# EAGLE board main_board2 (copy) (EAGLE 5.11)
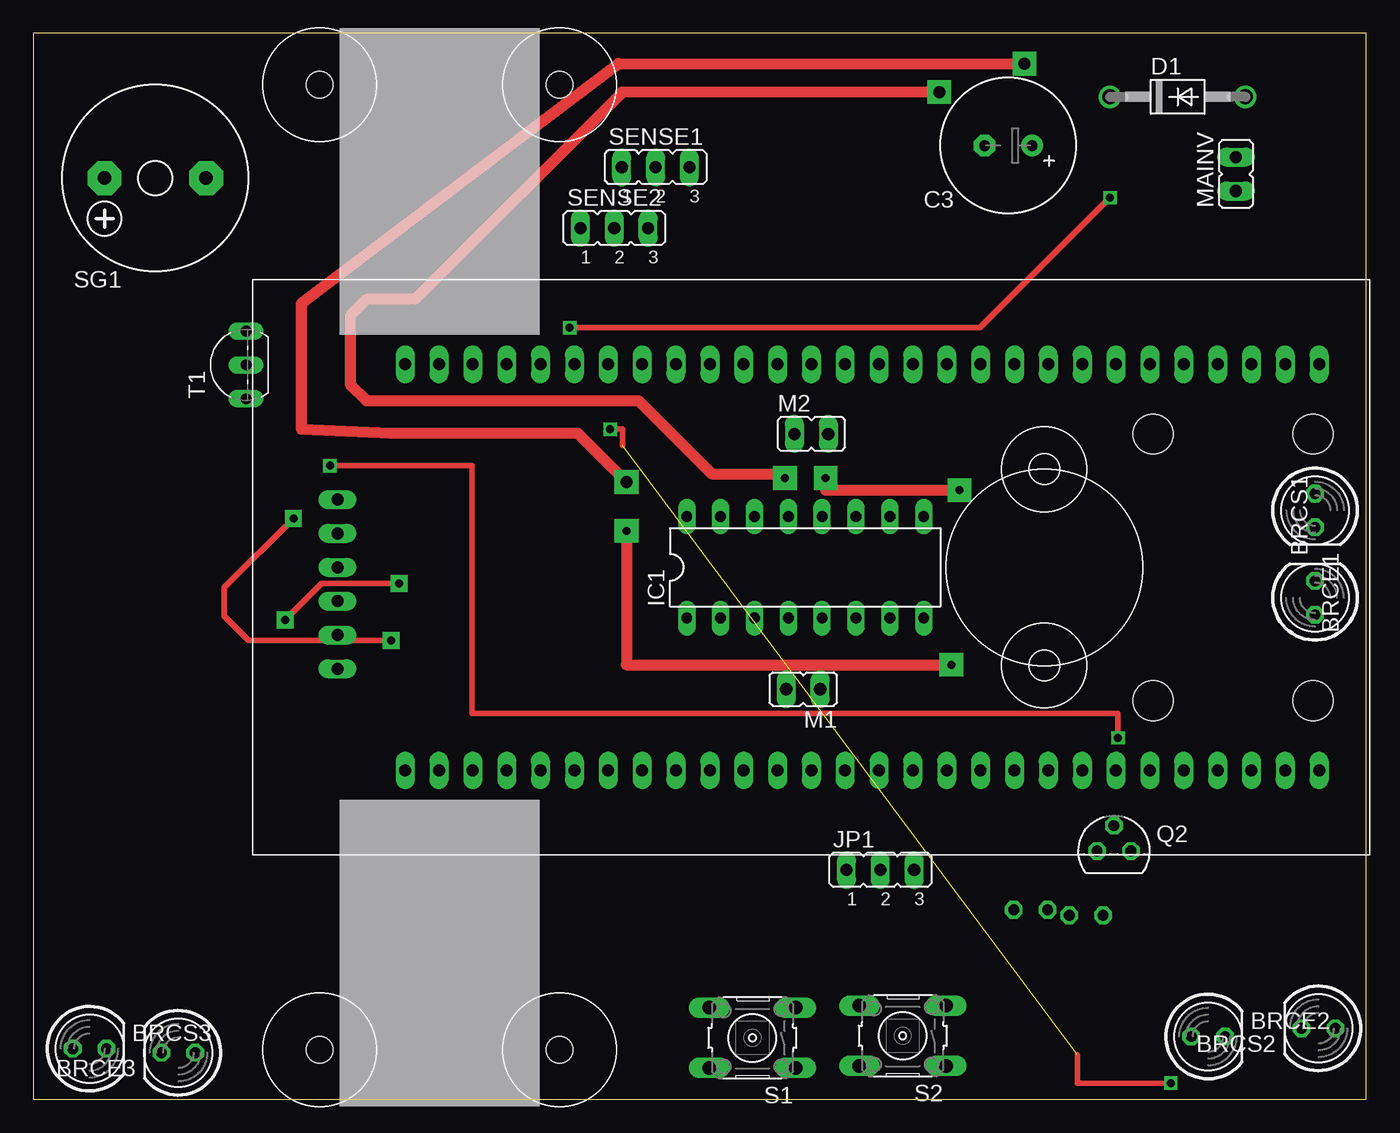
[diagram p0: board, top side]
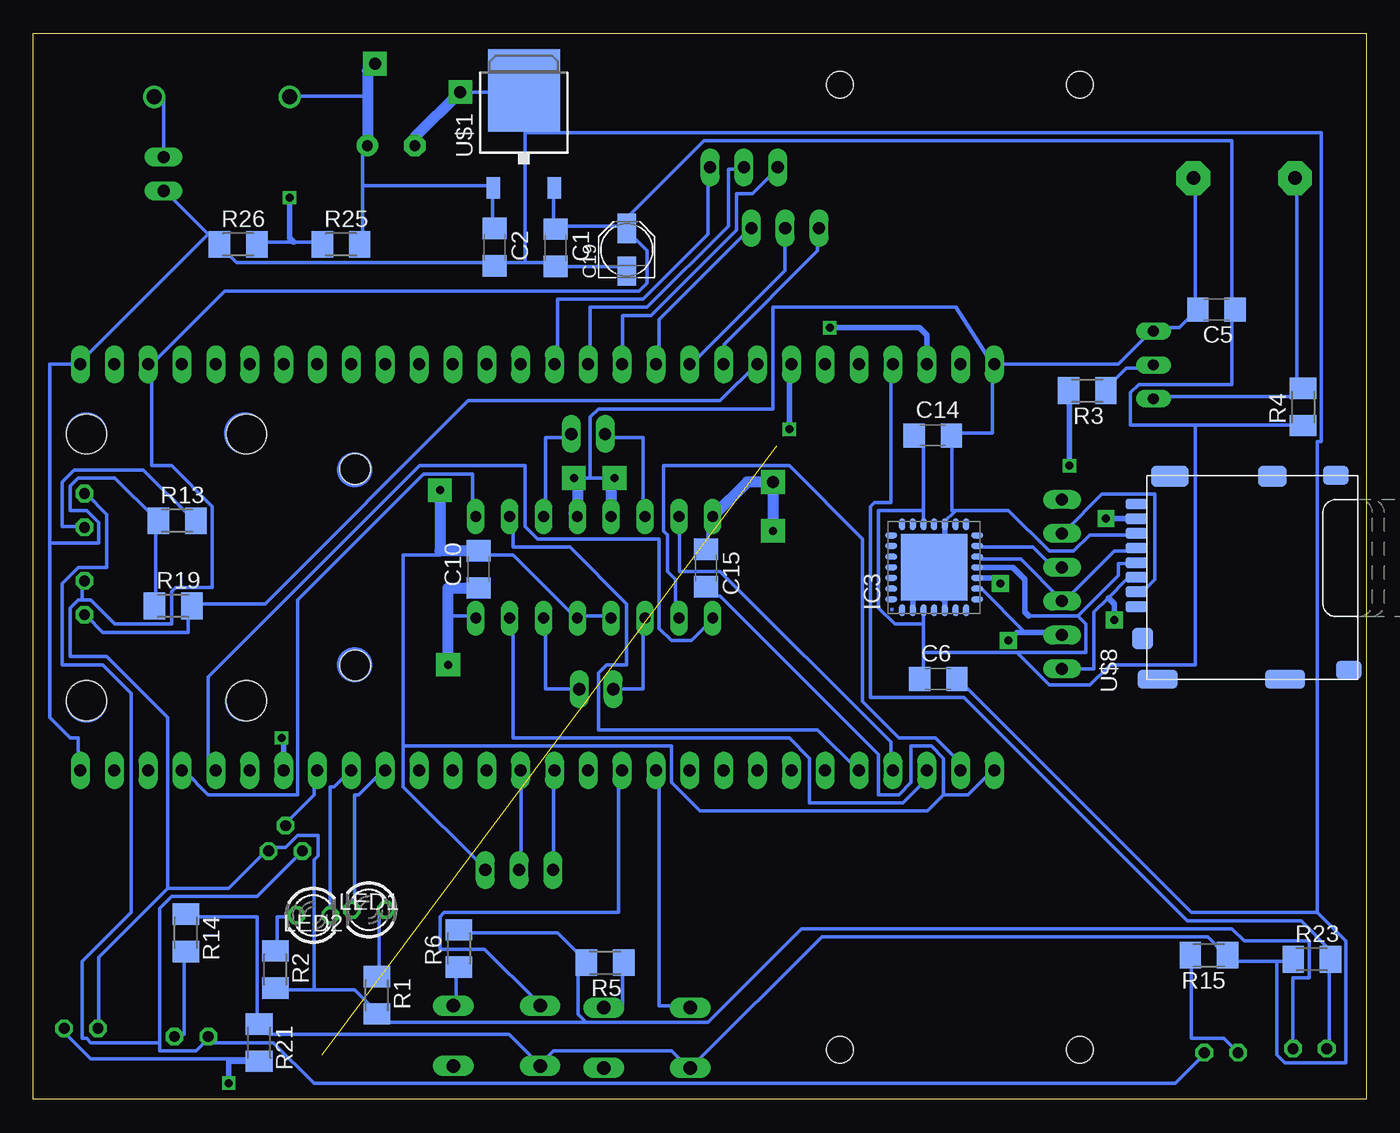
[diagram p1: board, bottom side, seen from below]

Size 100 x 80 mm. Coordinates in mm from the lower left corner, seen from the top.
Outline: 0,0 100,0 100,80 0,80 0,0
Copper layers (1*16): Top 0.035mm / dielectric 1.5mm / Bottom 0.035mm
Design rules "default": minimum track width 10mil, minimum drill 24mil, track to track 8mil, track to pad 8mil, pad to pad 8mil, via to via 8mil, smd to smd 8mil, copper to edge 40mil, drill to drill 8mil, minimum pad ring 10mil, minimum via ring 8mil, stop-mask expansion 4mil, vias tented up to drill 0mil, thermal gap 10mil
Holes 3 mm at 96.01,49.93 96.01,29.93 84.01,49.93 84.01,29.92

## Footprints (pad centres in the part's own frame; a part is rotated, then mirrored left to right if it is on the bottom)
LED5MM = drill 0.813 octagon: A -1.27,0; K 1.27,0
C1206 = smd 1.6 x 1.8: 1 -1.4,0; 2 1.4,0
E3,5-10 = drill 0.813 pad 1.6 round: + -1.778,0 | drill 0.813 pad 1.6 octagon: - 1.778,0
PANASONIC_B = smd 2.2 x 1.4: + 1.6,0; - -1.6,0
DO41-10 = drill 1.118 round: A 5.08,0; C -5.08,0
DIL16 = drill 0.813 long: 1 -8.89,-3.81; 2 -6.35,-3.81; 3 -3.81,-3.81; 4 -1.27,-3.81; 5 1.27,-3.81; 6 3.81,-3.81; 7 6.35,-3.81; 8 8.89,-3.81; 9 8.89,3.81; 10 6.35,3.81; 11 3.81,3.81; 12 1.27,3.81; 13 -1.27,3.81; 14 -3.81,3.81; 15 -6.35,3.81; 16 -8.89,3.81
QFPN-28 = smd 0.9 x 0.45: 1 -3.225,2.4; 2 -3.225,1.6; 3 -3.225,0.8; 4 -3.225,0; 5 -3.225,-0.8; 6 -3.225,-1.6; 7 -3.225,-2.4; 15 3.225,-2.4; 16 3.225,-1.6; 17 3.225,-0.8; 18 3.225,0; 19 3.225,0.8; 20 3.225,1.6; 21 3.225,2.4 | smd 0.45 x 0.9: 8 -2.4,-3.225; 9 -1.6,-3.225; 10 -0.8,-3.225; 11 0,-3.225; 12 0.8,-3.225; 13 1.6,-3.225; 14 2.4,-3.225; 22 2.4,3.225; 23 1.6,3.225; 24 0.8,3.225; 25 0,3.225; 26 -0.8,3.225; 27 -1.6,3.225; 28 -2.4,3.225 | smd 5 x 5: TH 0,0
JP2 = drill 0.914 long: 1 -2.54,0; 2 0,0; 3 2.54,0
LED3MM = drill 0.813 octagon: A -1.27,0; K 1.27,0
JP1 = drill 0.914 long: 1 0,-1.27; 2 0,1.27
TO92 = drill 0.813 octagon: 1 1.27,0; 2 0,1.905; 3 -1.27,0
M1206 = smd 1.6 x 2: 1 -1.4,0; 2 1.4,0
B3F-10XX = drill 1.016 long: 1 -3.251,2.261; 2 3.251,2.261; 3 -3.251,-2.261; 4 3.251,-2.261
F/CM12P = drill 1.016 pad 2.54 octagon: + 3.81,0; - -3.81,0
TO92-CBE = drill 0.813 long: B 0,0; C -2.54,0; E 2.54,0
DPAK = smd 1 x 1.6: 1 -2.28,-6.07; 3 2.28,-6.07 | smd 5.4 x 6.2: 2 0,1.23
STM32_DISCOVERY = drill 0.9 long: 3V3 -15.24,29.21; 5V 15.24,29.21; BOOT 15.24,21.59; GND@1 -15.24,34.29; GND@2 15.24,34.29; GND@3 -15.24,-34.29; GND@4 15.24,-34.29; NC@1 -15.24,31.75; NC@2 15.24,31.75; PA0 -15.24,-1.27; PA1 -15.24,-3.81; PA2 -15.24,-6.35; PA3 -15.24,-8.89; PA4 -15.24,-11.43; PA5 -15.24,-13.97; PA6 -15.24,-16.51; PA7 -15.24,-19.05; PA8 15.24,-21.59; PA9 15.24,-19.05; PA10 15.24,-16.51; PA11 15.24,-13.97; PA12 15.24,-11.43; PA13 15.24,-8.89; PA14 15.24,-6.35; PA15 15.24,-3.81; PB0 -15.24,-26.67; PB1 -15.24,-29.21; PB2 -15.24,-31.75; PB3 15.24,8.89; PB4 15.24,11.43; PB5 15.24,13.97; PB6 15.24,16.51; PB7 15.24,19.05; PB8 15.24,24.13; PB9 15.24,26.67; PB10 -5.08,-39.37; PB11 -2.54,-39.37; PB12 0,-39.37; PB13 2.54,-39.37; PB14 5.08,-39.37; PB15 7.62,-39.37; PC0 -15.24,8.89; PC1 -15.24,6.35; PC2 -15.24,3.81; PC3 -15.24,1.27; PC4 -15.24,-21.59; PC5 -15.24,-24.13; PC6 15.24,-31.75; PC7 15.24,-29.21; PC8 15.24,-26.67; PC9 15.24,-24.13; PC10 15.24,-1.27; PC11 15.24,1.27; PC12 15.24,3.81; PC13 -15.24,24.13; PC14 -15.24,21.59; PC15 -15.24,19.05; PD0 -15.24,16.51; PD1 -15.24,13.97; PD2 15.24,6.35; RST -15.24,11.43; VBAT -15.24,26.67
MICRO_SD_CONNECTOR = smd 0.8 x 1.6: 1 -2.03,8.2; 2 -0.93,8.2; 3 0.17,8.2; 4 1.27,8.2; 5 2.37,8.2; 6 3.47,8.2; 7 4.57,8.2; 8 5.67,8.2 | smd 1.55 x 2.8: 9 7.735,5.7 | smd 1.55 x 2.1: 10 7.735,-2 | smd 1.4 x 1.9: 11 7.81,-6.75; 12 -6.79,-7.75 | smd 1.4 x 3: 13 -7.49,-2.95; 14 -7.49,6.6 | smd 1.6 x 1.55: 15 -4.43,7.725
BALLB = hole 2.286: -7.366,0; 7.366,0
MOTORB = hole 2: -9,7.25; 9,7.25

## Placement (x,y rotation side)
BRCE1  [LED5MM]  96.16,44.2 270 top
BRCE2  [LED5MM]  88.14,4.72 0 top
BRCE3  [LED5MM]  10.87,3.51 180 top
BRCS1  [LED5MM]  96.16,37.64 90 top
BRCS2  [LED5MM]  96.42,5.33 180 top
BRCS3  [LED5MM]  4.22,3.81 0 top
C1  100n  [C1206]  60.81,63.91 270 bottom
C2  100n  [C1206]  65.38,63.96 270 bottom
C3  2000uF  [E3,5-10]  73.15,71.58 180 top
C5  100n  [C1206]  11.23,59.28 180 bottom
C6  100n  [C1206]  32.11,31.55 0 bottom
C10  100n  [C1206]  66.6,39.78 90 bottom
C14  100n  [C1206]  32.51,49.83 0 bottom
C15  100n  [C1206]  49.53,39.88 270 bottom
C19  1u  [PANASONIC_B]  55.47,63.75 90 bottom
D1  1N4004  [DO41-10]  85.85,75.23 0 top
IC1  L293D  [DIL16]  57.91,39.93 0 top
IC3  LIS3LV02DQ  [QFPN-28]  32.41,39.93 90 bottom
JP1  [JP2]  63.55,17.22 0 top
LED1  [LED3MM]  78.99,13.82 0 bottom
LED2  [LED3MM]  74.83,14.22 180 bottom
M1  [JP1]  57.76,30.78 90 top
M2  [JP1]  58.37,49.94 270 top
MAINV  [JP1]  90.22,69.44 0 top
Q2  BC557  [TO92]  81.08,18.64 0 top
R1  1k  [M1206]  74.22,7.82 270 bottom
R2  1k  [M1206]  81.84,9.75 270 bottom
R3  1k  [M1206]  20.93,53.19 180 bottom
R4  Rbuzz  [M1206]  4.72,51.97 90 bottom
R5  10k  [M1206]  57.1,10.26 180 bottom
R6  10k  [M1206]  68.07,11.33 90 bottom
R13  200  [M1206]  89.2,43.43 0 bottom
R14  200  [M1206]  88.54,12.5 270 bottom
R15  200  [M1206]  11.79,10.82 180 bottom
R19  10k  [M1206]  89.51,37.03 0 bottom
R21  10k  [M1206]  83.06,4.27 270 bottom
R23  10k  [M1206]  4.06,10.52 0 bottom
R25  100k  [M1206]  76.91,64.16 0 bottom
R26  50k  [M1206]  84.63,64.16 0 bottom
S1  [B3F-10XX]  53.95,4.62 180 top
S2  [B3F-10XX]  65.23,4.78 180 top
SENSE1  [JP2]  46.69,69.95 0 top
SENSE2  [JP2]  43.59,65.38 0 top
SG1  F/CM12P  [F/CM12P]  9.14,69.14 180 top
T1  [TO92-CBE]  15.95,55.12 90 top
U$1  LF33CDT  [DPAK]  63.2,74.47 0 bottom
U$2  STM32_DISCOVERY  [STM32_DISCOVERY]  62.18,39.93 270 top
U$8  MICROSD_SPI_MODE  [MICRO_SD_CONNECTOR]  9.04,39.01 90 bottom
U$9  POLOLU952  [BALLB]  75.84,39.93 90 top
U$10  POLOLU0993B  [MOTORB]  30.48,68.88 0 top
U$11  POLOLU0993B  [MOTORB]  30.48,10.97 180 top

## Library data of the parts
BRCE1-BRCE3 BRCS1-BRCS3 LED1 LED2 = led
C1-C3 C5 C6 C10 C14 C15 C19 = rcl
D1 = diode
IC1 = st-microelectronics; MPN: L293D; OC_FARNELL: 9589619; OC_NEWARK: 56P8249
IC3 = st-microelectronics; MF: Arrow Electronics; MPN: LIS3LV02DQ; OC_FARNELL: 1220909; OC_NEWARK: 89K0642
JP1 M1 M2 MAINV SENSE1 SENSE2 = jumper
Q2 = transistor-pnp
R1-R6 R13-R15 R19 R21 R23 R25 R26 = resistor
S1 S2 = switch-omron; MPN: B3F-1000; OC_FARNELL: 176432; OC_NEWARK: 36M3542
SG1 = buzzer; OC_FARNELL: unknown; OC_NEWARK: unknown
T1 = transistor
U$1 U$9-U$11 = robot
U$2 = stm32_discovery
U$8 = con-molex-microsd

## Nets
+3V3: BRCS1.K BRCS2.K BRCS3.K C1.1 C5.1 C6.1 C14.1 C19.+ IC3.3 IC3.11 IC3.19 Q2.1 R1.2 R2.2 R4.1 R5.2 R6.2 U$1.3 U$2.3V3 U$8.4
+7V: C2.1 C3.+ C10.1 C15.1 D1.C IC1.8 IC1.16 R25.2 U$1.1
GND: C1.2 C2.2 C3.- C5.2 C6.2 C10.2 C14.2 C15.2 C19.- IC1.4 IC1.5 IC1.12 IC1.13 IC3.2 IC3.5 IC3.17 JP1.3 MAINV.1 R13.1 R14.1 R15.1 R19.1 R21.1 R23.1 R26.1 S1.2 S2.2 SG1.- T1.E U$1.2 U$2.GND@1 U$2.GND@2 U$2.GND@3 U$2.GND@4 U$8.6
N$1: SENSE1.3 U$2.PA0
N$2: SENSE1.2 U$2.PA1
N$3: SENSE1.1 U$2.PA2
N$4: SENSE2.3 U$2.PA3
N$5: SENSE2.2 U$2.PA4
N$6: SENSE2.1 U$2.PA5
N$7: LED2.A R1.1
N$8: LED1.A R2.1
N$9: R3.1 T1.B
N$10: R4.2 SG1.+ T1.C
N$11: R6.1 S2.3
N$12: R5.1 S1.3
N$28: BRCE1.K R13.2
N$29: BRCE2.K R14.2
N$30: BRCE3.K R15.2
N$31: BRCE1.A BRCE2.A BRCE3.A Q2.3
N$43: D1.A MAINV.2
N$44: BRCS1.A R19.2 U$2.PA6
N$46: BRCS2.A R21.2 U$2.PA7
N$53: IC1.3 M1.2
N$54: IC1.6 M1.1
N$55: IC1.14 M2.1
N$56: IC1.11 M2.2
PA8: U$2.PA8
PA9: U$2.PA9
PA10: U$2.PA10
PA11: U$2.PA11
PA12: U$2.PA12
PA13: S1.4 U$2.PA13
PA14: S2.4 U$2.PA14
PA15: U$2.PA15
PB0: BRCS3.A R23.2 U$2.PB0
PB1: R25.1 R26.2 U$2.PB1
PB2: U$2.PB2
PB3: U$2.PB3
PB4: LED2.K U$2.PB4
PB5: LED1.K U$2.PB5
PB6: Q2.2 U$2.PB6
PB7: R3.2 U$2.PB7
PB8: IC1.1 U$2.PB8
PB9: IC1.9 U$2.PB9
PB10: U$2.PB10
PB11: U$2.PB11 U$8.2
PB12: IC3.13 U$2.PB12
PB13: IC3.12 U$2.PB13 U$8.5
PB14: IC3.9 U$2.PB14 U$8.7
PB15: IC3.10 U$2.PB15 U$8.3
PC0: U$2.PC0
PC1: U$2.PC1
PC2: U$2.PC2
PC3: U$2.PC3
PC4: U$2.PC4
PC5: U$2.PC5
PC6: IC1.2 U$2.PC6
PC7: IC1.7 U$2.PC7
PC8: IC1.15 U$2.PC8
PC9: IC1.10 U$2.PC9
PC10: JP1.1 U$2.PC10
PC11: JP1.2 U$2.PC11
PC12: U$2.PC12
PC13: U$2.PC13
PC14: U$2.PC14
PC15: U$2.PC15

## Tracks (layer width: path | path; a pad name or v marks a point on that pad's centre or on a via)
+3V3
  Bottom 0.254: 78.94,8.23 81.69,8.23 R2.2 | 78.94,8.23 75.89,8.23 74.37,6.71 R1.2 74.07,6.4 73.46,5.79 58.52,5.79 | R6.2 67.97,12.5 60.66,12.5 58.52,10.36 R5.2 58.52,10.06 59.13,10.06 59.13,6.4 58.52,5.79 | 58.52,5.79 49.38,5.79 42.37,12.8 10.06,12.8 9.14,11.89 4.27,11.89 4.27,9.14 5.49,9.14 BRCS3.K | 12.8,50.6 4.88,50.6 R4.1 | 12.8,50.6 17.68,50.6 17.68,53.03 17.07,53.65 10.06,53.65 10.06,59.13 C5.1 10.06,59.44 10.06,71.93 49.68,71.93 56.08,65.53 | 21.64,36.27 25.3,36.27 | 21.64,36.27 18.59,39.32 18.59,40.23 17.37,40.23 U$8.4 | IC3.11 28.96,39.93 | 33.22,33.53 33.22,31.7 C6.1 | 33.22,33.53 33.22,35.66 | 33.22,35.66 33.22,36.58 IC3.3 | 33.22,44.2 33.22,49.68 33.83,49.68 C14.1 | 33.22,44.2 33.22,43.28 IC3.19 | 33.22,35.66 35.36,35.66 36.58,36.88 36.58,44.2 33.22,44.2 | 21.64,36.27 21.03,35.66 21.03,33.53 26.21,33.53 | 26.21,33.53 33.22,33.53 | 12.8,50.6 12.8,32.61 19.2,32.61 20.73,31.09 23.77,31.09 26.21,33.53 | U$1.3 60.96,68.28 60.96,65.53 C1.1 60.66,65.53 56.08,65.53 | 56.08,65.53 55.47,65.53 C19.+ | 89.92,15.85 85.34,15.85 82.6,18.59 Q2.1 82.3,18.9 81.08,18.9 80.16,19.81 78.64,19.81 78.64,18.29 78.94,17.98 78.94,8.23 | 89.92,15.85 95.1,10.67 95.1,5.49 BRCS2.K | 96.32,37.49 96.32,38.71 BRCS1.K | 96.32,37.49 96.62,37.49 97.23,36.88 97.23,33.22 94.49,33.22 89.92,28.65 89.92,15.85 | 91.14,55.17 91.14,47.55 89.61,47.55 86.56,44.5 86.56,38.41 89.31,38.41 89.61,38.1 89.61,35.66 93.88,35.66 95.71,37.49 96.32,37.49 | 91.14,55.17 85.65,60.66 54.56,60.66 53.95,61.27 53.95,63.7 55.47,65.23 C19.+ | 91.14,55.17 U$2.3V3 | C19.+ 56.08,65.53
  Bottom 0.406: 28.96,39.93 26.52,39.93 25.6,39.01 25.6,36.58 25.3,36.27
+7V  (via drill 0.6 pad 1.78, 0.9 pad 1.78)
  Top 0.813: v44.5,46.33 40.84,49.99 26.82,49.99 20.12,50.29 20.12,59.74 43.89,77.72 v74.37,77.72 | v68.89,32.61 44.5,32.61 v44.5,42.67
  Bottom 0.254: C2.1 65.53,65.53 65.53,68.28 U$1.1 65.53,68.58 75.29,68.58 | C15.1 49.38,41.45 49.38,43.59 IC1.16 | 75.29,68.58 75.29,71.32 74.98,71.32 C3.+ | 75.29,68.58 75.29,64.31 R25.2 | IC1.8 67.06,36.27 68.89,36.27 | D1.C 80.77,75.29 74.93,75.29
  Bottom 0.813: IC1.16 46.43,46.33 v44.5,46.33 v44.5,42.67 | v74.37,77.72 74.93,77.17 74.93,75.29 C3.+ | C10.1 68.89,38.38 68.89,36.27 v68.89,32.61
GND  (via drill 0.6 pad 1.78, 0.9 pad 1.78)
  Top 0.813: v67.97,75.59 44.2,75.59 28.65,60.05 24.99,60.05 23.77,58.83 23.77,53.65 24.99,52.43 45.41,52.43 50.9,46.94 56.39,46.94 v56.39,46.63 | v69.49,45.72 59.44,45.72 v59.44,46.63
  Bottom 0.254: R14.1 88.39,13.72 83.21,13.72 83.21,5.79 R21.1 82.91,5.49 82.3,4.88 64.31,4.88 62.18,2.74 S2.2 61.87,2.74 60.96,3.66 52.12,3.66 50.9,2.44 S1.2 50.6,2.44 40.84,12.19 11.89,12.19 10.67,10.97 R15.1 10.36,10.67 10.06,10.36 6.71,10.36 | 3.66,14.02 13.11,14.02 30.48,31.39 C6.2 | 3.66,14.02 1.52,11.89 1.52,2.74 6.1,2.74 6.71,3.35 6.71,10.36 | 6.71,10.36 5.49,10.36 R23.1 | 86.87,64.92 89.92,67.97 90.22,67.97 MAINV.1 | 86.87,64.92 86.26,64.31 R26.1 85.95,64.01 84.73,62.79 65.53,62.79 C2.2 65.23,62.79 63.09,62.79 | R19.1 90.83,37.19 90.83,43.28 R13.1 90.83,43.59 93.88,46.63 96.62,46.63 97.23,46.02 97.23,44.2 96.01,44.2 95.1,43.28 95.1,41.76 98.75,41.76 | 98.75,41.76 98.75,55.17 96.62,55.17 | 98.75,41.76 98.75,28.65 97.23,27.13 96.62,27.13 96.62,24.69 U$2.GND@2 | 86.87,64.92 96.62,55.17 | 96.62,55.17 U$2.GND@1 | SG1.- 12.8,68.89 12.8,59.44 C5.2 12.8,59.13 14.02,57.91 15.85,57.91 T1.E 16.15,57.61 18.59,55.17 U$2.GND@3 28.04,55.17 | 30.79,44.2 26.82,44.2 23.77,41.15 21.95,41.15 20.73,42.37 17.37,42.37 U$8.6 | 30.79,44.2 31.7,43.28 IC3.17 | 30.79,44.2 31.09,44.2 31.09,49.68 C14.2 31.09,49.99 28.04,49.99 28.04,55.17 | 31.7,22.86 31.7,25.6 32.61,26.52 34.14,26.52 34.14,23.77 35.05,22.86 36.58,22.86 36.58,25.91 48.46,37.8 48.77,37.8 49.38,38.41 C15.2 | 31.7,22.86 29.87,22.86 28.04,24.69 U$2.GND@4 | 63.09,62.79 60.96,62.79 C1.2 60.66,62.48 55.78,62.48 55.47,62.18 C19.- | 63.09,72.54 63.09,75.59 U$1.2 63.4,75.59 v67.97,75.59 | 63.09,72.54 63.09,62.79 | IC1.4 56.69,36.27 59.13,36.27 IC1.5 59.44,36.27 64.01,40.84 66.45,40.84 C10.2 | 72.24,26.52 72.24,40.84 69.49,40.84 69.49,41.18
  Bottom 0.254: 72.24,26.52 72.24,23.47 66.14,17.37 JP1.3 | v56.39,46.63 58.22,46.63 | 58.22,46.63 v59.44,46.63 | 31.7,22.86 32.92,21.64 49.99,21.64 52.12,23.77 52.12,26.52 72.24,26.52 | 28.04,55.17 30.79,59.44 44.5,59.44 44.5,51.82 57.61,51.82 58.22,51.21 58.22,46.63 | 3.66,14.02 3.66,49.38 3.35,49.38 3.35,72.54 63.09,72.54
  Bottom 0.406: IC3.2 34.01,37.67 34.14,37.8 33.53,38.41 32.61,38.41 31.61,37.4 IC3.5 IC3.17
  Bottom 0.813: 59.44,43.99 IC1.12 59.18,46.63 v59.44,46.63 | v67.97,75.59 71.37,72.19 C3.- | C10.2 69.49,41.18 v69.49,45.72 | v56.39,46.63 56.64,46.63 IC1.13
N$1
  Bottom 0.254: U$2.PA0 60.66,55.17 60.66,60.05 54.25,60.05 49.38,64.92 49.38,69.8 SENSE1.3
N$2
  Bottom 0.254: U$2.PA1 58.22,55.17 58.22,59.44 53.95,59.44 47.85,65.53 47.85,69.8 46.94,69.8 SENSE1.2
N$3
  Bottom 0.254: U$2.PA2 55.78,55.17 55.78,58.83 53.65,58.83 47.24,65.23 47.24,67.97 46.02,67.97 44.2,69.8 SENSE1.1
N$4
  Bottom 0.254: U$2.PA3 53.03,55.17 53.03,58.52 46.33,65.23 SENSE2.3
N$5
  Bottom 0.254: U$2.PA4 50.6,55.17 43.59,62.18 SENSE2.2
N$6
  Bottom 0.254: U$2.PA5 48.16,55.17 48.16,56.69 41.15,63.7 41.15,65.23 SENSE2.1
N$7
  Bottom 0.254: R1.1 74.07,9.45 74.07,14.02 73.76,14.02 LED2.A
N$8
  Bottom 0.254: R2.1 81.69,11.28 81.69,13.72 80.47,13.72 LED1.A
N$9
  Bottom 0.254: R3.1 19.51,53.34 17.98,54.86 16.15,54.86 T1.B
N$10
  Bottom 0.254: T1.C 15.85,52.73 5.49,52.73 4.88,53.34 R4.2 4.88,53.65 5.18,53.65 5.18,68.89 SG1.+
N$11
  Bottom 0.254: R6.1 68.28,9.75 68.28,7.32 S2.3
N$12
  Bottom 0.254: R5.1 55.78,10.06 55.78,7.01 57,7.01 S1.3
N$28
  Bottom 0.254: R13.2 88.09,43.59 91.75,47.24 96.93,47.24 97.84,46.33 97.84,42.98 96.32,42.98 BRCE1.K
N$29
  Bottom 0.254: R14.2 88.7,10.97 88.7,4.88 89.31,4.88 BRCE2.K
N$30
  Bottom 0.254: R15.2 13.11,10.67 13.11,4.57 10.67,4.57 BRCE3.K
N$31
  Bottom 0.254: 86.87,4.57 86.56,4.27 81.99,4.27 78.94,1.22 14.33,1.22 12.19,3.35 BRCE3.A | 90.53,4.27 90.53,3.66 87.78,3.66 86.87,4.57 | 90.53,4.27 90.53,14.33 89.61,15.24 83.21,15.24 Q2.3 | 86.87,4.57 BRCE2.A | 90.53,4.27 95.71,4.27 96.01,4.57 96.32,4.57 96.32,10.36 92.66,14.02 92.66,30.48 94.79,32.61 97.84,32.61 97.84,38.71 96.62,39.93 94.49,39.93 94.49,43.89 96.01,45.41 BRCE1.A
N$43
  Bottom 0.254: MAINV.2 90.22,74.98 90.83,74.98 D1.A
N$44
  Bottom 0.254: BRCS1.A 96.01,36.27 94.79,35.05 88.39,35.05 88.39,36.88 R19.2 88.09,37.19 82.6,37.19 67.36,52.43 48.46,52.43 45.72,55.17 U$2.PA6
N$46  (via drill 0.6)  (1 unrouted)
  Top 0.406: v43.28,50.29 44.2,50.29 44.2,49.07 | v85.34,1.22 78.33,1.22 78.33,3.35
  Bottom 0.254: R21.2 83.21,3.05 95.71,3.05 97.84,5.18 BRCS2.A
  Bottom 0.406: U$2.PA7 43.28,55.17 v43.28,50.29 | R21.2 85.34,2.87 v85.34,1.22
N$53
  Bottom 0.254: IC1.3 54.25,35.97 54.25,30.79 M1.2
N$54
  Bottom 0.254: IC1.6 61.57,35.97 61.57,30.79 M1.1
N$55
  Bottom 0.254: IC1.14 54.25,43.89 54.25,49.68 57,49.68 M2.1
N$56
  Bottom 0.254: IC1.11 61.57,43.89 61.57,49.68 59.74,49.68 M2.2
PA13
  Bottom 0.254: U$2.PA13 53.03,24.69 53.03,7.01 50.9,7.01 S1.4
PA14
  Bottom 0.254: U$2.PA14 56.08,24.69 56.08,14.02 69.19,14.02 69.49,13.72 69.49,11.28 66.14,11.28 62.18,7.32 S2.4
PB0
  Bottom 0.254: BRCS3.A 2.74,3.96 2.74,10.36 R23.2 2.74,10.67 2.74,11.28 4.88,13.41 13.41,13.41 30.18,30.18 37.19,30.18 37.19,44.5 36.88,44.81 35.66,44.81 35.66,55.17 U$2.PB0
PB1  (via drill 0.6)
  Top 0.406: v40.23,57.91 71.02,57.91 v80.77,67.67
  Bottom 0.254: R25.1 78.33,64.31 80.47,64.31 83.21,64.31 R26.2
  Bottom 0.406: U$2.PB1 32.97,57.35 33.53,57.91 v40.23,57.91 | v80.77,67.67 80.77,64.62 80.47,64.31
PB4
  Bottom 0.254: LED2.K 75.89,14.33 75.89,22.86 75.59,22.86 73.76,24.69 U$2.PB4
PB5
  Bottom 0.254: LED1.K 77.72,23.47 77.42,23.47 76.2,24.69 U$2.PB5
PB6
  Bottom 0.254: Q2.2 81.08,20.73 78.94,22.86 78.94,24.69 U$2.PB6
PB7  (via drill 0.6)
  Top 0.406: v22.25,47.55 32.92,47.55 32.92,28.96 81.38,28.96 v81.38,27.13
  Bottom 0.406: R3.2 22.25,53.19 v22.25,47.55 | v81.38,27.13 81.23,27.13 U$2.PB7
PB8
  Bottom 0.254: IC1.1 49.07,35.97 50.6,34.44 52.12,34.44 53.03,35.36 53.03,42.06 62.18,42.06 63.09,42.98 63.09,47.55 71.02,47.55 86.87,31.7 86.87,24.69 U$2.PB8
PB9
  Bottom 0.254: IC1.9 67.06,43.89 67.06,46.94 70.71,46.94 80.16,37.49 80.16,22.86 86.87,22.86 88.7,24.69 U$2.PB9
PB11
  Bottom 0.254: U$8.2 17.07,38.1 16.76,38.41 16.46,38.41 15.85,39.01 15.85,45.41 19.81,45.41 22.55,42.67 U$2.PB11
PB12
  Bottom 0.254: IC3.13 28.96,41.45 24.99,41.45 23.47,39.93 U$2.PB12
PB13
  Bottom 0.254: IC3.12 28.96,40.54 25.91,40.54 22.86,37.49 U$2.PB13 22.55,37.49 18.9,41.15 17.37,41.15 U$8.5
PB14  (via drill 0.6 pad 1.27)
  Top 0.406: v26.82,34.44 16.15,34.44 14.33,36.27 14.33,38.41 v19.51,43.59
  Bottom 0.254: IC3.9 28.96,38.41 25.6,35.05 22.86,35.05 U$2.PB14
  Bottom 0.406: 22.86,35.05 26.21,35.05 v26.82,34.44 | v19.51,43.59 U$8.7
PB15  (via drill 0.6 pad 1.27)
  Top 0.406: v27.43,38.71 21.64,38.71 v18.9,35.97
  Bottom 0.254: U$8.3 17.37,39.01 17.98,39.01 19.36,37.64 20.42,36.58 20.42,32.31 U$2.PB15
  Bottom 0.406: IC3.10 27.85,39.13 v27.43,38.71 | v18.9,35.97 18.9,37.19 19.36,37.64
PC6
  Bottom 0.254: IC1.2 51.82,36.27 51.82,39.01 52.43,39.62 52.43,42.37 52.73,42.67 52.73,47.55 43.28,47.55 37.8,42.06 37.8,29.87 35.05,27.13 32.31,27.13 30.48,25.3 30.48,24.69 U$2.PC6
PC7
  Bottom 0.254: IC1.7 64.01,35.97 64.01,27.13 43.28,27.13 41.76,25.6 41.76,22.25 34.75,22.25 33.22,23.77 33.22,24.69 U$2.PC7
PC8
  Bottom 0.254: IC1.15 51.51,43.59 51.51,39.62 48.46,39.62 35.66,26.82 35.66,24.69 U$2.PC8
PC9
  Bottom 0.254: IC1.10 64.01,43.59 64.01,41.45 59.74,41.45 55.47,37.19 55.47,32.61 57,32.61 57.61,32 57.61,27.74 41.15,27.74 38.1,24.69 U$2.PC9
PC10
  Bottom 0.254: U$2.PC10 60.96,24.69 60.96,17.37 JP1.1
PC11
  Bottom 0.254: U$2.PC11 63.4,24.69 63.4,17.37 JP1.2
(copper drawn outside any net)
  shapes: Bottom circle x6